# Altium PCB MCU_PCB_Design_2.PcbDoc
Units mm, origin at the board's own origin, x right, y up, seen from the top; angles counter-clockwise.
Board outline 81.89 x 57.07 mm, 4 copper layers (Top Layer, Middle Layer, Blank Copper Layer, Bottom Layer), stack 0.567 mm thick; 30 components, 61 nets, 178 pads, 54 vias.
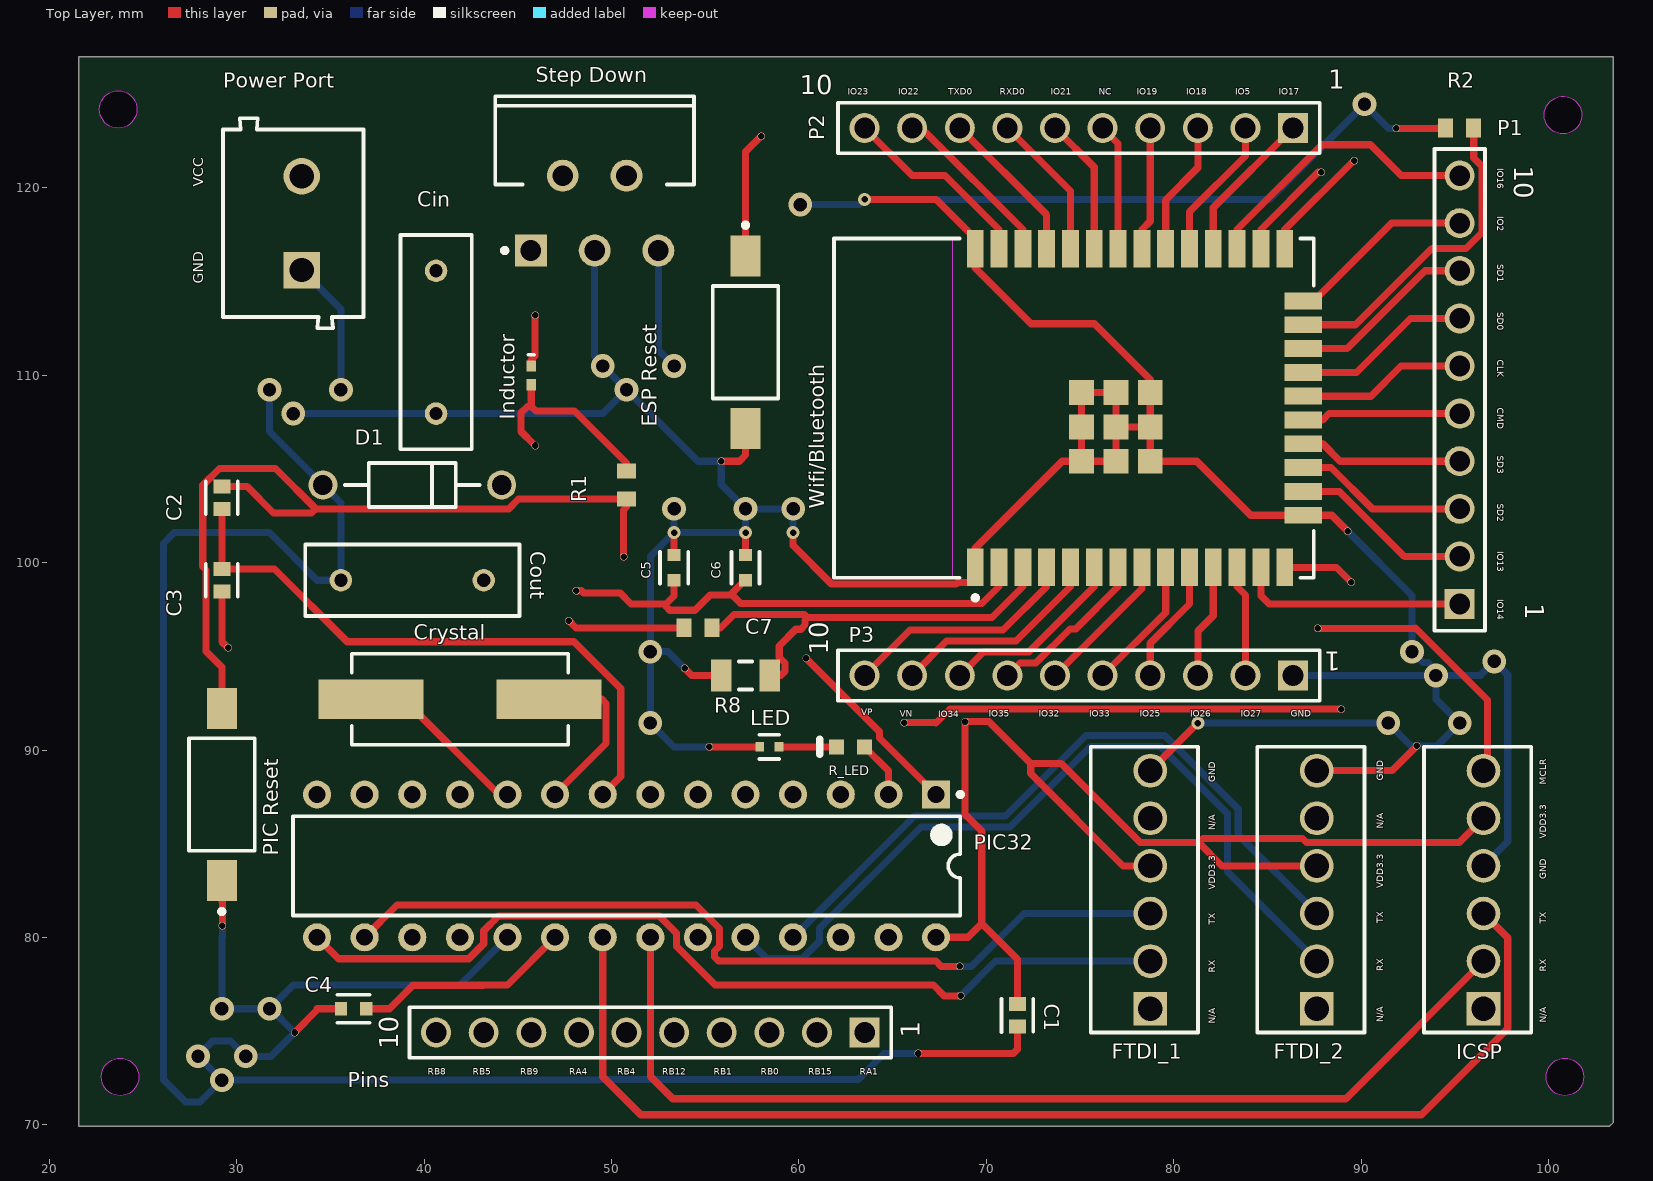
[diagram p0: Top Layer view]
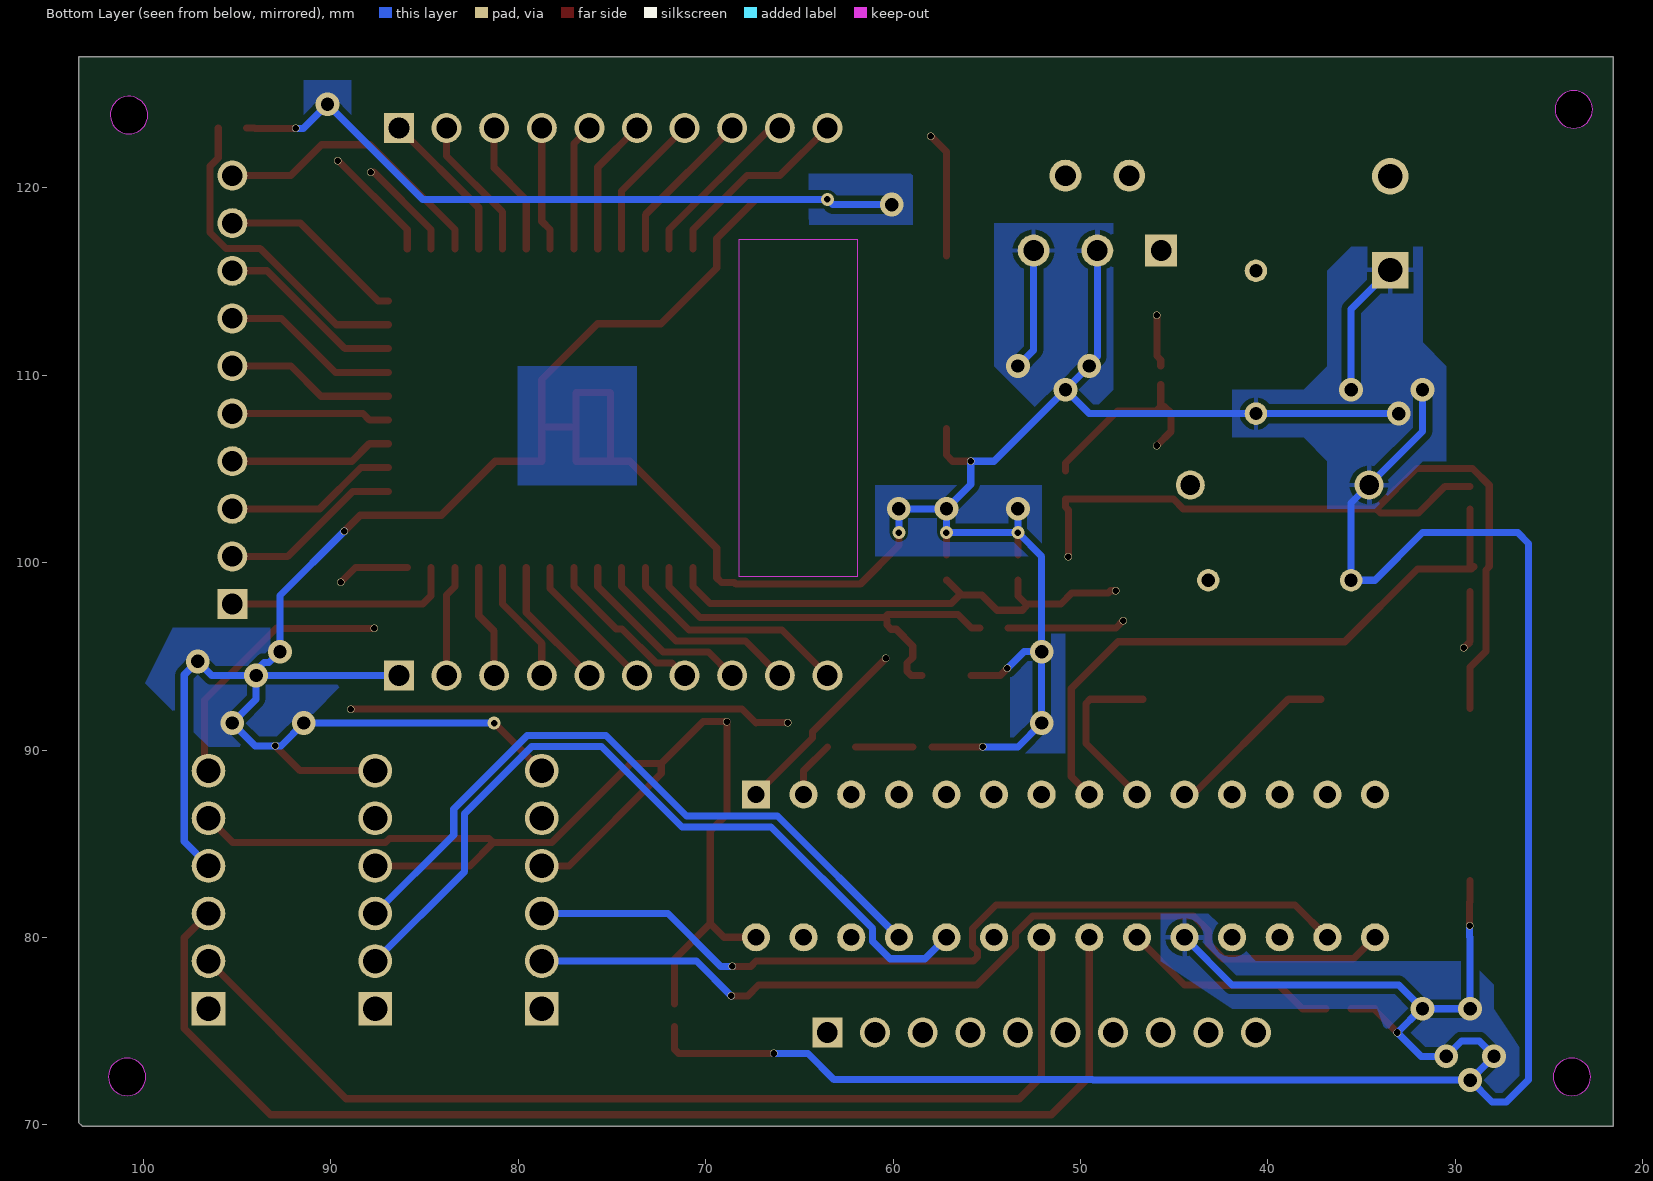
[diagram p1: Bottom Layer view, seen from below]
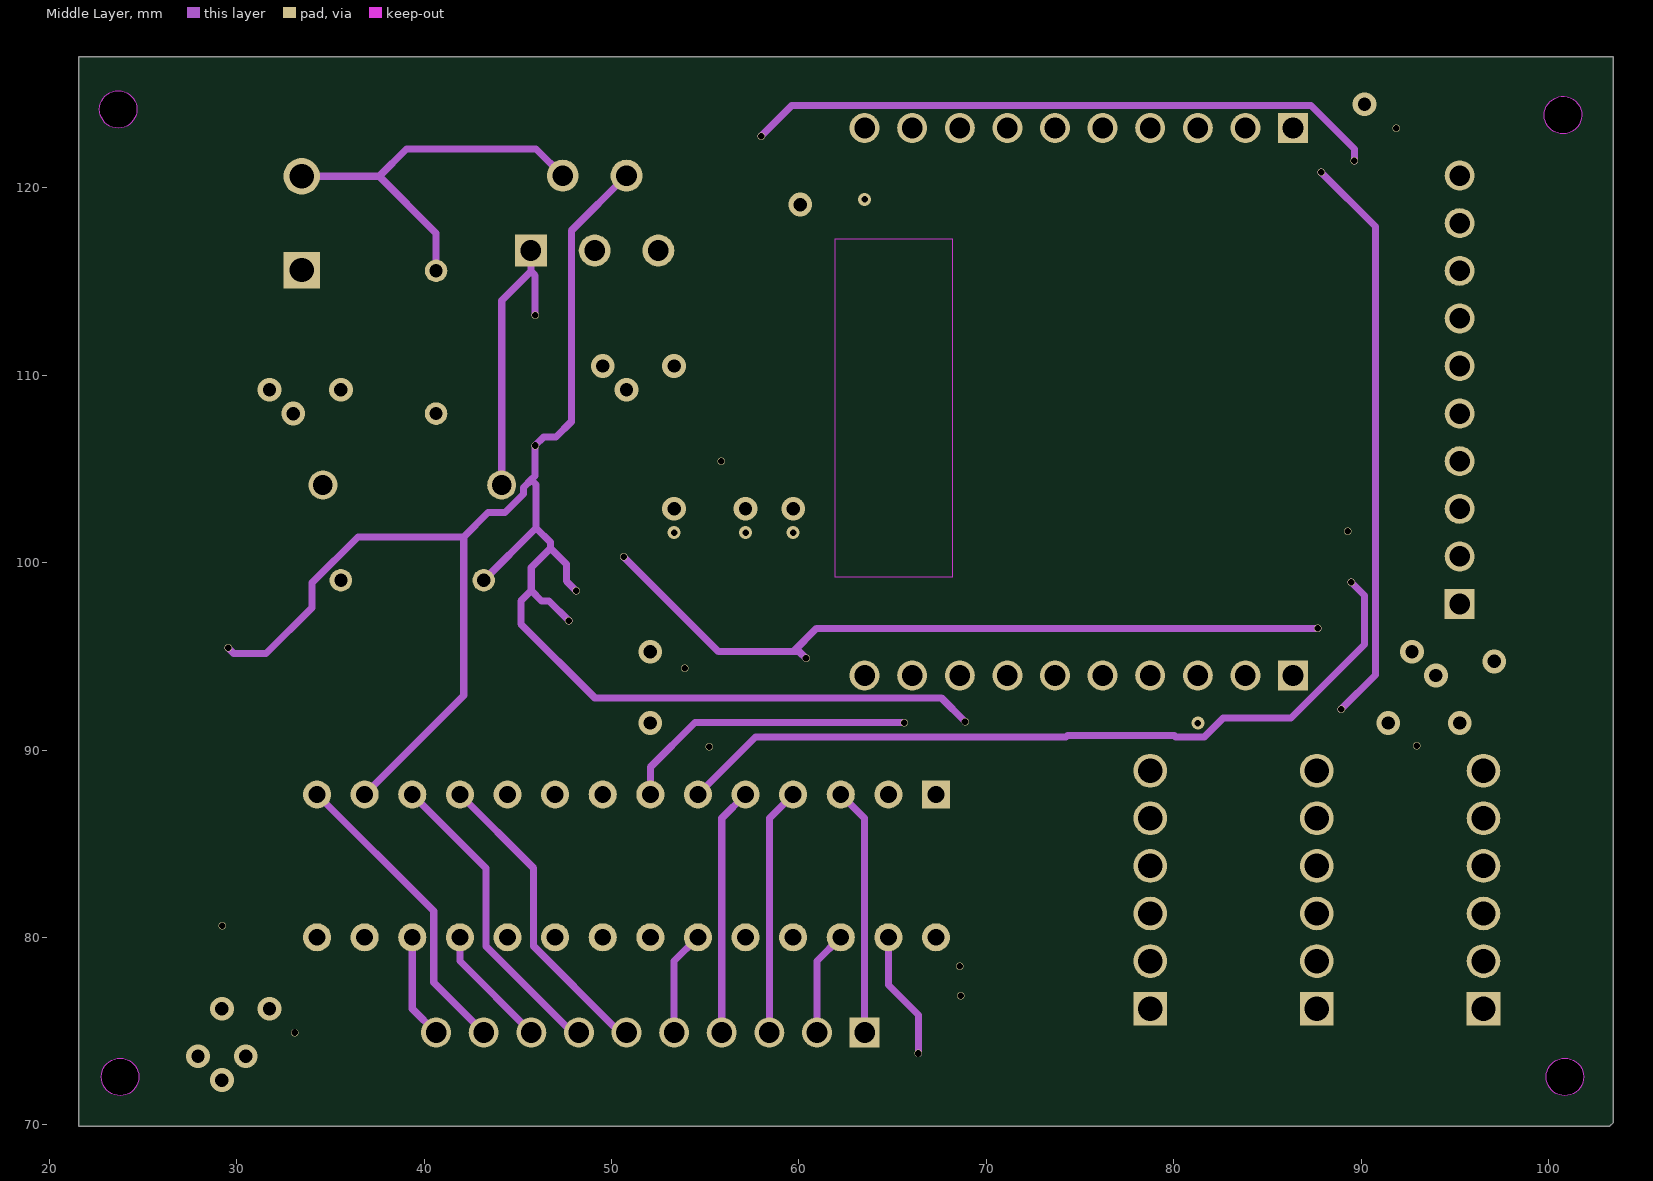
[diagram p2: Middle Layer]
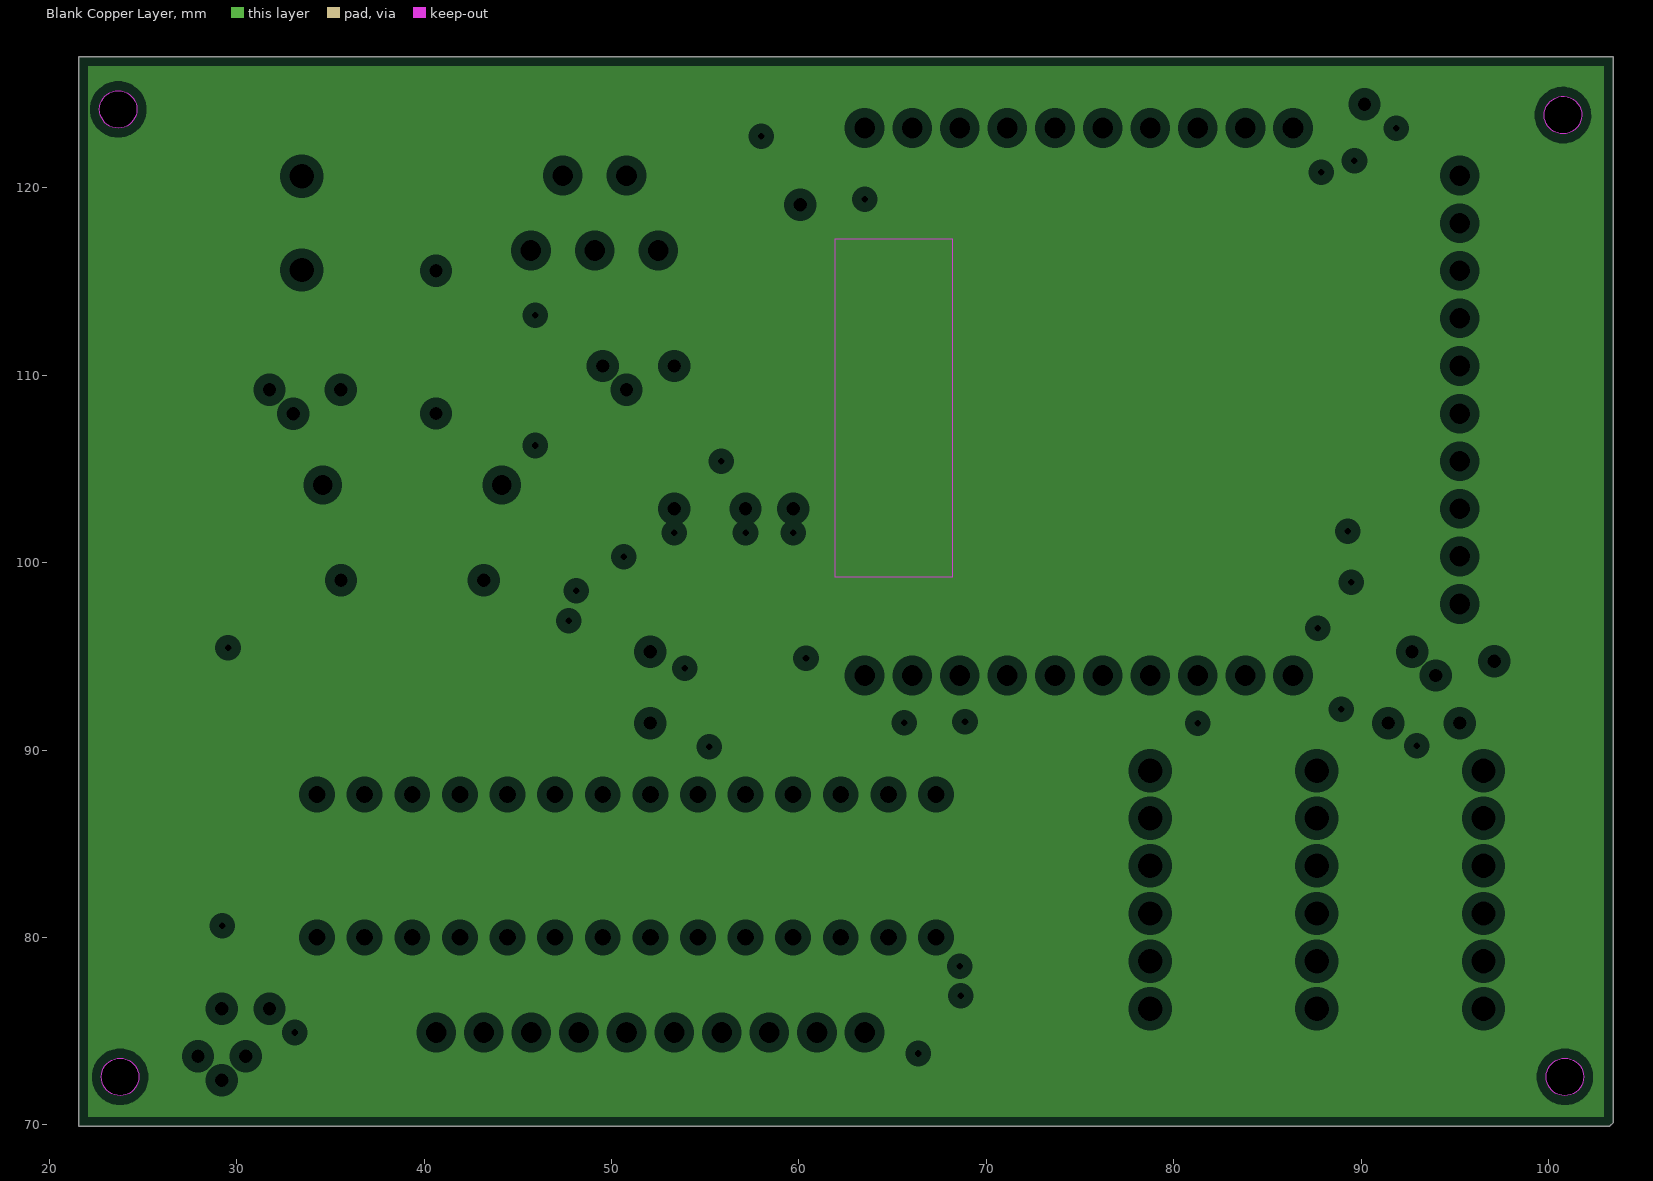
[diagram p3: Blank Copper Layer, clearances drawn from the general rule]
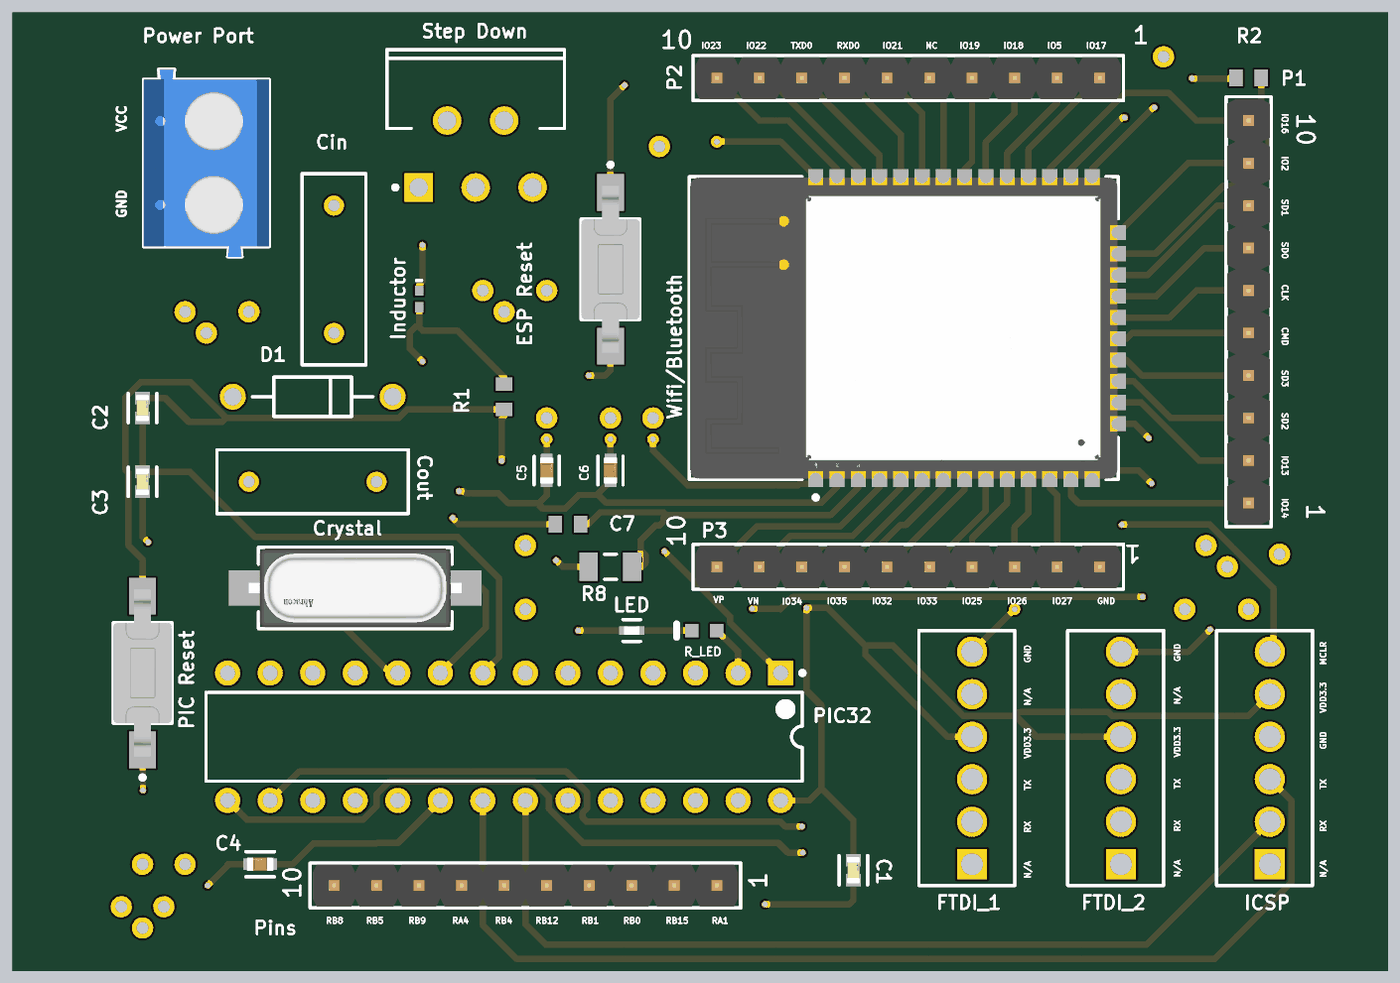
[diagram p4: 3D render of the assembled board from above, using the file's embedded part models]

## Layer stack, top to bottom
Top Solder: solder mask 0.0102, Solder Resist, Dk 3.5
Top Layer: signal copper 0.035
Dielectric 1: prepreg 0.32, FR-4, Dk 4.8
Middle Layer: signal copper 0.0175
Dielectric 3: prepreg 0.0711, PP-006, Dk 4.1
Blank Copper Layer: plane copper 0.0175
Dielectric 2: prepreg 0.0711, PP-006, Dk 4.1
Bottom Layer: signal copper 0.035
Bottom Solder: solder mask 0.0102, Solder Resist, Dk 3.5

## Board outline
21.565,69.926 21.565,126.975 21.59,127 103.454,127 103.454,70.129 103.251,69.926
cut-out: 23.682,123.182 cw(c23.682,124.182) 22.682,124.182 cw(c23.682,124.182) 23.682,125.182 cw(c23.682,124.182) 24.682,124.182 cw(c23.682,124.182)
cut-out: 100.762,122.876 cw(c100.762,123.876) 99.762,123.876 cw(c100.762,123.876) 101.144,124.8 cw(c100.762,123.876)
cut-out: 23.784,71.565 cw(c23.784,72.565) 22.784,72.565 cw(c23.784,72.565) 23.784,73.565 cw(c23.784,72.565) 24.784,72.565 cw(c23.784,72.565)
cut-out: 100.863,71.565 cw(c100.863,72.565) 99.863,72.565 cw(c100.863,72.565) 100.863,73.565 cw(c100.863,72.565) 101.863,72.565 cw(c100.863,72.565)

## Design rules (kind name [scope] priority, off if disabled: settings)
AcuteAngle [All] p1: minimum=4.50000000000000E+0001 checktracksonly=TRUE
AssemblyTestPointUsage [(not InNetClass('NOTESTPOINTS'))] p1: allowmultiple=TRUE
AssemblyTestPointUsage AssemblyTestPointUsageN [InNetClass('NOTESTPOINTS')] p2: valid=2 allowmultiple=TRUE
AssemblyTestpoint [All] p1: testpointundercomponent=TRUE minsize=0.8 maxsize=2 preferedsize=1 minholesize=0 maxholesize=0.35 preferedholesize=0 testpointgrid=1.27 usegrid=FALSE gridoriginx=87.5 gridoriginy=62.5 gridtolerance=0 allowsidetop=TRUE minspacing=2.54 // Zollner
BoardOutlineClearance BoardCopperOutlineClearance [(OnLayer('Top Layer') OR OnLayer('Bottom Layer') )] p1: gap=0.2 ignorepadtopadclearanceinfootprint=FALSE
Clearance PadToViaClearance [IsVia and not IsComponentVia vs IsPad] p1: gap=0.02 ignorepadtopadclearanceinfootprint=TRUE
Clearance "Clearance (FAB)" [All] p2: gap=0.203 ignorepadtopadclearanceinfootprint=TRUE except(0.305: Arc-Poly Track-Poly SMDPad-Poly THPad-Poly Via-Poly Fill-Poly Poly-Poly)
ComponentClearance ComponentClearance_NetTie [((ObjectKind = 'Component') And (ComponentType = 'Net Tie')) Or (Footprint = 'StarPoint') Or (Footprint like 'NetTieVia*')] p1: gap=-3.81 collisioncheckmode=3 verticalgap=-3.81 showdistances=FALSE
ComponentClearance [All] p2: gap=0.254 collisioncheckmode=3 verticalgap=0.254 showdistances=FALSE
DiffPairsRouting [All] p1: maxlimit=1.27 minlimit=0.09 mostfreqgap=0.203 toplayer_minwidth=0.09 toplayer_maxwidth=2.54 toplayer_prefwidth=0.254 midlayer1_mingap=0.127 midlayer1_minwidth=0.127 midlayer1_maxwidth=2.54 midlayer1_prefwidth=0.254 bottomlayer_minwidth=0.09 bottomlayer_maxwidth=2.54 bottomlayer_prefwidth=0.254 maxuncoupledlength=12.7
FabricationTestPointUsage [All] p1: valid=2 allowmultiple=FALSE
FabricationTestpoint [All] p1: side=3 testpointundercomponent=TRUE minsize=1.016 maxsize=2.54 preferedsize=1.524 minholesize=0 maxholesize=1.016 preferedholesize=0.813 testpointgrid=0.025 allowsidetop=TRUE allowsidebottom=TRUE usegrid=FALSE gridtolerance=0
HoleSize [All] p1: absolutevalues=TRUE maxlimit=6.3 minlimit=0.2 maxpercent=80.000 minpercent=20.000 // Zollner
HoleToHoleClearance HoleToHoleClearance_NetTieVia [InPadClass('NetTieVias') vs InPadClass('NetTieVias')] p1: gap=0.5 allowstackedmicrovias=TRUE
HoleToHoleClearance [All] p2: gap=0.254 allowstackedmicrovias=TRUE // Zollner
MinimumAnnularRing [All] p1: minimumring=0.15 // PCBWAY
MinimumSolderMaskSliver [All] p1: minsoldermaskwidth=0.2 // Zollner
PlaneClearance PlaneClearance_1 [All] p1: clearance=0.508
PlaneConnect [All] p1: pad.planeconnectstyle=Relief pad.reliefexpansion=0.508 pad.reliefentries=4 pad.reliefconductorwidth=0.254 pad.reliefairgap=0.254 via.planeconnectstyle=Direct via.reliefexpansion=0.508 via.reliefentries=4 via.reliefconductorwidth=0.254 via.reliefairgap=0.254
PolygonConnect [All] p1: thpad.connectstyle=Relief thpad.reliefconductorwidth=0.254 thpad.reliefentries=4 thpad.polygonreliefangle="90 Angle" thpad.airgapwidth=0.254 smdpad.connectstyle=Relief smdpad.reliefconductorwidth=0.254 smdpad.reliefentries=4 smdpad.polygonreliefangle="90 Angle" smdpad.airgapwidth=0.254 via.connectstyle=Direct via.reliefconductorwidth=0.254 via.reliefentries=4 via.polygonreliefangle="90 Angle" via.airgapwidth=0.254
RoutingVias [All] p1: holewidth=0.35 width=0.4 viastyle="Through Hole" minholewidth=0.2 minwidth=0.2 maxholewidth=6.35 maxwidth=1.27
SMDEntry [not IsTestpoint] p1: side=TRUE corner=TRUE anyangle=FALSE
SMDNeckDown [not IsTestpoint] p1: percent=90.000
SMDToCorner [All] p1: distance=10000
SMDToPlane [All] p1: distance=0
ShortCircuit [All vs not IsBoardCutoutRegion] p1: allowed=FALSE
SilkToSolderMaskClearance [IsPad] p1: minsilkscreentomaskgap=0.127 clearancetoexposedcopper=TRUE
SolderMaskExpansion [All] p1: expansion=0.127 istentingtop=FALSE // Zollner
SolderMaskExpansion SolderMaskExpansionToHoles [All] p2: expansion=0.1 istentingtop=FALSE soldermaskfromhole=TRUE // Zollner
UnRoutedNet [All] p1: checkbadconnections=TRUE
Width [All] p1: maxlimit=0.5 minlimit=0.203 preferedwidth=0.254
16 further rules are at their usual default settings.

## Classes and differential pairs
component class voltage_regulator: Cin Cout D1 Inductor "Power Port" "Step Down"
component class pic32: C1 C2 C3 C4 Crystal FTDI_1 FTDI_2 ICSP LED PIC32 "PIC Reset" Pins R1 R_LED
component class esp32_wroom: C5 C6 C7 "ESP Reset" P1 P2 P3 R2 R8 Wifi/Bluetooth

## Components (designator, comment, footprint, x,y, rotation, side; value= is the part's Value field where it differs from the comment)
C1 "0.1µF" FP-C0603C-CF-MFG 71.653,75.844 r270 top value="0.10 μF"
C2 "0.1µF" FP-C0603C-CF-MFG 29.21,103.47 r270 top value="0.10 μF"
C3 "0.1µF" FP-C0603C-CF-MFG 29.21,99.06 r270 top value="0.10 μF"
C4 "10µF" FP-GRM188-0_1-e0_2_0_55-MFG 36.235,76.2 r180 top
C5 "10µF" FP-GRM188-0_1-e0_2_0_55-MFG 53.34,99.735 r90 top
C6 "10µF" FP-GRM188-0_1-e0_2_0_55-MFG 57.15,99.735 r90 top
C7 "1μF" CAPC3216X110X50LL20T25 57.15,93.98 r0 top
Cin "Cap" RAD-0.3 40.64,111.76 r90 top value=4.7uF
Cout "Cap" RAD-0.3 39.37,99.06 r180 top value=4.7uF
Crystal "" FP-ABLS-MFG 41.91,92.71 r180 top
D1 "1N5817" ONSC-AXIAL_LEAD-2-59-10_P 39.37,104.14 r180 top
"ESP Reset" "FSMSM" TECO-FSMSM-2_V 57.15,111.76 r270 top (schematic designator Switch2)
FTDI_1 "640456-6" TECO-640456-6_V 78.74,76.2 r90 top
FTDI_2 "640456-6" TECO-640456-6_V 87.63,76.2 r90 top
ICSP "640456-6" TECO-640456-6_V 96.52,76.2 r90 top
Inductor "68uH" 0402-A 45.72,109.99 r270 top
LED "HSMG-C190" AVAG-HSMX-C190_V 62.75,90.17 r180 top
P1 "61301011121" 61301011121 95.25,109.22 r90 top locked
P2 "61301011121" 61301011121 74.93,123.19 r180 top locked
P3 "61301011121" 61301011121 74.93,93.98 r180 top locked
PIC32 "PIC32MX150F128B-I/SP" MCHP-SPDIP-SP28 50.8,83.82 r270 top
"PIC Reset" "FSMSM" TECO-FSMSM-2_V 29.21,87.63 r90 top (schematic designator Switch)
Pins "61301011121" 61301011121 52.07,74.93 r180 top
"Power Port" "12V" 691102710002 33.02,118.11 r90 top locked
R1 "10k" RESC1608X55X25ML10T15 50.8,104.14 r90 top
R2 "10k" RESC1608X55X25ML10T15 95.25,123.19 r0 top
R8 "10k" RESC1608X55X25ML10T15 54.61,96.52 r180 top
R_LED "470" FP-CR0402-MFG 58.42,90.17 r0 top
"Step Down" "LM2595T-3.3/NOPB" NDH0005A 49.1,118.65 r0 top locked
Wifi/Bluetooth "ESP32-WROOM-32" FP-ESP32-WROOM-32-MFG 74.665,108.245 r90 top locked

## Footprints (in the part's own frame and the unit in brackets; to place one, negate y for a bottom-side part, rotate by r counter-clockwise, add the part's x,y. Pads: shape width x height; smd on the part's side, far side on the other; paste and mask are expansions set on the pad)
0402-A [mm] "Chip Inductor, Body 1.0x0.5mm, IPC High Density"
  rect 0.6x0.5 smd: 1(-0.5,0) 2(0.5,0)
  silkscreen extent -1.1,-0.15 -1.1,0.15, body extent -0.55,-0.3 0.55,0.3, height 0.55
61301011121 [mm] "Pin Header, pitch 2.54 mm, THT, Vertical, single row, 10p"
  rect 1.6x1.6 hole 1.1: 1(-11.43,0)
  round 1.6 hole 1.1: 2(-8.89,0) 3(-6.35,0) 4(-3.81,0) 5(-1.27,0) 6(1.27,0) 7(3.81,0) 8(6.35,0) 9(8.89,0) 10(11.43,0)
  silkscreen extent -12.85,-1.35 12.85,1.35, body extent -12.7,-1.27 12.7,1.27, height 8.57
691102710002 [mm] "5,00mm - modular - blue - Horizontal entry with pressure clamp - 9,9 mm height - 02p"
  rect 1.95x1.95 hole 1.3: 1(-2.5,-0.45)
  round 1.95 hole 1.3: 2(2.5,-0.45)
  silkscreen extent -5.6,-3.75 5.6,3.75, body extent -5.6,-3.75 5.6,3.75, height 9.96
AVAG-HSMX-C190_V [mm] "SMD, 2-Leads, Body 1.6x0.8mm, Height 0.9mm"
  rect 0.8x0.8 smd: 1(-0.75,0) 2(0.75,0)
  silkscreen extent 1.65,-0.4 1.65,0.4, body extent -0.8,-0.4 0.8,0.4, height 0.9
CAPC3216X110X50LL20T25 [mm] "Chip Capacitor, 2-Leads, Body 3.20x1.60mm, IPC High Density"
  rect 1.1x1.7 smd: 1(-1.3,0) 2(1.3,0)
  silkscreen extent -0.35,-0.75 0.35,0.75, body extent -1.7,-0.9 1.7,0.9, height 1.1
FP-ABLS-MFG [mm]
  rect 5.6x2.1 smd paste+0 mask+0: 1(-4.75,0) 2(4.75,0)
  silkscreen extent -5.77,-2.42 5.77,2.42, body extent -7.65,-2.52 7.65,2.52, height 0.25
FP-C0603C-CF-MFG [mm]
  rect 0.75x0.9 smd paste+0 mask+0: 1(-0.6,0) 2(0.6,0)
  silkscreen extent -0.87,-0.85 0.88,0.85, body extent -1.2,-0.6 1.2,0.6, height 0.25
FP-CR0402-MFG [mm]
  rect 0.475x0.5 smd paste+0 mask+0: 1(-0.512,0) 2(0.513,0)
  silkscreen extent -0.53,-0.65 0.53,0.65, body extent -0.85,-0.38 0.85,0.38, height 0.25
FP-ESP32-WROOM-32-MFG [mm]
  rect 2x0.9 smd paste+0 mask+0: 1(-8.5,5.26) 2(-8.5,3.99) 3(-8.5,2.72) 4(-8.5,1.45) 5(-8.5,0.18) 6(-8.5,-1.09) 7(-8.5,-2.36) 8(-8.5,-3.63) 9(-8.5,-4.9) 10(-8.5,-6.17) 11(-8.5,-7.44) 12(-8.5,-8.71) 13(-8.5,-9.98) 14(-8.5,-11.25) 25(8.5,-11.25) 26(8.5,-9.98) 27(8.5,-8.71) 28(8.5,-7.44) 29(8.5,-6.17) 30(8.5,-4.9) 31(8.5,-3.63) 32(8.5,-2.36) 33(8.5,-1.09) 34(8.5,0.18) 35(8.5,1.45) 36(8.5,2.72) 37(8.5,3.99) 38(8.5,5.26)
  rect 0.9x2 smd paste+0 mask+0: 15(-5.715,-12.25) 16(-4.445,-12.25) 17(-3.175,-12.25) 18(-1.905,-12.25) 19(-0.635,-12.25) 20(0.635,-12.25) 21(1.905,-12.25) 22(3.175,-12.25) 23(4.445,-12.25) 24(5.715,-12.25)
  rect 1.33x1.33 smd paste+0 mask+0: 39(-2.835,-2.24) 39(-2.835,-0.405) 39(-2.835,-4.075) 39(-1,-0.405) 39(-1,-4.075) 39(-1,-2.24) 39(0.835,-0.405) 39(0.835,-4.075) 39(0.835,-2.24)
  Keep-Out Layer region: -9,6.45 9,6.45 9,12.75 -9,12.75
  Keep-Out Layer region: -9,6.45 9,6.45 9,12.75 -9,12.75
  silkscreen extent -10.25,-12.8 9.05,12.8, body extent -9.6,-13.35 9.6,12.9, height 0.25
FP-GRM188-0_1-e0_2_0_55-MFG [mm]
  rect 0.65x0.7 smd paste+0 mask+0: 1(-0.675,0) 2(0.675,0)
  silkscreen extent -0.85,-0.75 0.85,0.75, body extent -1.1,-0.55 1.1,0.55, height 0.25
MCHP-SPDIP-SP28 [mm] "DIP, 28-Leads, Body 34.86x6.79mm, Pitch 2.54mm"
  rect 1.5x1.5 hole 0.9: 1(-3.81,16.51)
  round 1.5 hole 0.9: 2(-3.81,13.97) 3(-3.81,11.43) 4(-3.81,8.89) 5(-3.81,6.35) 6(-3.81,3.81) 7(-3.81,1.27) 8(-3.81,-1.27) 9(-3.81,-3.81) 10(-3.81,-6.35) 11(-3.81,-8.89) 12(-3.81,-11.43) 13(-3.81,-13.97) 14(-3.81,-16.51) 15(3.81,-16.51) 16(3.81,-13.97) 17(3.81,-11.43) 18(3.81,-8.89) 19(3.81,-6.35) 20(3.81,-3.81) 21(3.81,-1.27) 22(3.81,1.27) 23(3.81,3.81) 24(3.81,6.35) 25(3.81,8.89) 26(3.81,11.43) 27(3.81,13.97) 28(3.81,16.51)
  silkscreen extent -3.93,-17.8 2.65,17.94, body extent -3.95,-17.77 3.95,17.77, height 5.08
NDH0005A [mm] "FM, 5-Leads, Body 10.6x4.7mm, Pitch 1.7mm"
  rect 1.7x1.7 hole 1.1: 1(-3.4,-2)
  round 1.7 hole 1.1: 2(-1.7,2) 3(0,-2) 4(1.7,2) 5(3.4,-2)
  silkscreen extent -5.3,-2.12 5.3,6.23, body extent -5.35,-2.31 5.35,6.28, height 21.1
ONSC-AXIAL_LEAD-2-59-10_P [mm] "AXIAL, 2-Leads, Diameter 2.35mm"
  round 1.55 hole 1.05: 1(-4.77,0) 2(4.77,0)
  silkscreen extent -3.59,-1.17 3.59,1.17
RAD-0.3 [mm] "Radial Cap, Thru-Hole; 2 Leads; 0.3 in Pin Spacing"
  round 1.2 hole 0.7: 1(-3.81,0) 2(3.81,0)
  silkscreen extent -5.71,-1.91 5.71,1.91
RESC1608X55X25ML10T15 [mm] "Chip Resistor, 2-Leads, Body 1.60x0.80mm, IPC Low Density"
  rect 0.8x1 smd: 1(-0.75,0) 2(0.75,0)
  body extent -0.85,-0.45 0.85,0.45, height 0.55
TECO-640456-6_V [mm] "THD, 6-Leads, Body 15.24x5.72mm, Pitch 2.54mm"
  rect 1.8x1.8 hole 1.3: 1(0,0)
  round 1.8 hole 1.3: 2(2.54,0) 3(5.08,0) 4(7.62,0) 5(10.16,0) 6(12.7,0)
  silkscreen extent -1.27,-2.54 13.97,3.18, body extent -1.27,-2.54 13.97,3.18, height 10.03
TECO-FSMSM-2_V [mm] "SMD, 2-Leads, Body 6x3.5mm, Pitch 9.19mm"
  rect 2.2x1.6 smd: 1(-4.595,0)
  rect 2.18x1.6 smd: 2(4.595,0)
  silkscreen extent -6.37,-1.75 3,1.75, body extent -4.98,-1.75 4.98,1.75, height 4.4

## Part data
C1 C2 C3: library part CMP-2006-03061-2, "CAP CER 0.1UF 50V X7R 0603 / C0603C104K5RACTU", Capacitance="0.10 μF", Manufacturer=KEMET, Manufacturer Part Number=C0603C104K5RACTU, Package=C0603C-CF, Temperature="-55°C to +125°C", Temperature Characteristic=X7R, Temperature Coefficient=30ppm/°C, Temperature Range High=+125°C, Temperature Range Low=-55°C, Tolerance=0.1, Voltage Rating="50 V", Automotive=Yes, Automotive Grade="Grade 1", Category=Cap, ComponentLink2Description=Datasheet, ComponentLink2URL=https://api.kemet.com/component-edge/download/datasheet/C0603C100J5GACAUTO.pdf, Device Class L1="Passive Components", Device Class L2=Capacitors, Device Class L3="Ceramic Capacitors", Digikey Description="CAP CER 0.1UF 50V X7R 0603", Height=0.87mm, Lead Free=Yes, Material=Ceramic, Octopart=https://octopart.com/c0603c104k5ractu-kemet-139244, RoHS=TRUE
C4 C5 C6: library part CMP-2006-02793-3, "Chip Multilayer Ceramic Capacitors for General Purpose, 0603, 10uF, X5R, 15%, 20%, 6.3V / GRM188R60J106ME47J", Capacitance=10uF, Case Code (Imperial)=0603, Case Code (Metric)=1608, Dielectric=X5R, Max Operating Temperature=85°C, Min Operating Temperature=-55°C, Package Quantity=10000, Tolerance=20%, Voltage=6.3V, Case/Package=0603, Depth=0.8mm, Height=0.8mm, Lead Free="Lead Free", Length=1.6mm, Mount="Surface Mount", Packaging="Tape and Reel", Radiation Hardening=No, REACH SVHC="No SVHC", Termination=SMD/SMT, Thickness=0.035inch, Voltage Rating=6.3V, Voltage Rating (DC)=6.3V, Width=0.8mm
C7: library part CMP-2000-06011-1, "Chip Capacitor, 1 uF, +/- 10%, 50 V, -55 to 125 degC, 1206 (3216 Metric), RoHS, Tape and Reel / C1206C105K5RACTU", Capacitance=1uF, Capacitance - nF=1000nF, Case Code - in=1206, Case Code - mm=3216, Case Height=1mm, Case Length=3.2mm, Case Width=1.6mm, Dielectric=X7R, Manufacturer=Kemet, Maximum Operating Temperature=+125C, Minimum Operating Temperature=-55C, Operating Temperature Range=-55Cto+125C, Package / Case=1206(3216metric), Package Description="2-Pin Surface Mount Device, Body 3.2 x 1.6 mm", Temperature Coefficient / Code=+/-15%, Tolerance=10%, Voltage Rating=50V, Brand=Kemet, Class=Class1, Datasheet URL=http://www.kemet.com/docfinder?Partnumber=C1206C105K5RACTU, Datasheet Version=02/2016, Dimensions=1.6mmWx3.2mmLx1mmH, Factory Pack Quantity=2500, Manufacturer URL=http://www.kemet.com/, Mounting Technology=SurfaceMount, Package Reference=1206, Packaging=Reel, Product=GeneralTypeMLCCs, Product Category=MultilayerCeramicCapacitorsMLCC-SMD/SMT, RoHS=Details, Series=C1206C, Termination Style=SMD/SMT, Type=SMDMLCCX7R6.3-250VDCCommericalGrade, Voltage Rating DC=50V
Cin: "Capacitor", Supplier Part Number 1=399-T356E475M035AT-ND, LatestRevisionDate=17-Jul-2002, LatestRevisionNote="Re-released for DXP Platform.", PackageDescription="Radial Cap, Thru-Hole; 2 Leads; 0.3 in Pin Spacing", PackageReference=RAD-0.3, Published=8-Jun-2000, Publisher="Altium Limited", Supplier 1=Digi-Key
Cout: "Capacitor", LatestRevisionDate=17-Jul-2002, LatestRevisionNote="Re-released for DXP Platform.", PackageDescription="Radial Cap, Thru-Hole; 2 Leads; 0.3 in Pin Spacing", PackageReference=RAD-0.3, Published=8-Jun-2000, Publisher="Altium Limited"
Crystal: library part CMP-27762-000003-1, "CRYSTAL 16.0000MHZ 18PF SMD / ABLS-16.000MHZ-K4T", Frequency=16MHz, Load Capacitance=18pF, Manufacturer=Abracon, Manufacturer Part Number=ABLS-16.000MHZ-K4T, Package=ABLS, Temperature="-40°C to +125°C", Temperature Range High=+125°C, Temperature Range Low=-40°C, Tolerance=30ppm, Automotive=No, Category=Crys, ComponentLink2Description=Datasheet, ComponentLink2URL=https://abracon.com/Resonators/abls.pdf, Device Class L1="Passive Components", Device Class L2="Crystals / Oscillators", Device Class L3=Crystals, Digikey Description="CRYSTAL 16.0000MHZ 18PF SMD", Esr=40Ω, Height=4.3mm, Lead Free=Yes, Mouser Description="Crystal 16MHz ±30ppm (Tol) ±50ppm (Stability) 18pF FUND 40Ohm 2-Pin HC-49/US SMD T/R", Octopart=https://octopart.com/abls-16.000mhz-k4t-abracon-18618626, RoHS=TRUE, Series=ABLS, Stability=50ppm, Standoff Height=0mm
D1: library part CMP-1055-00036-1, "Rectifier, 2-Pin Axial_Lead, Pb-Free, Bulk Bag", Manufacturer="On Semiconductor", ComponentLink1Description="Manufacturer URL", ComponentLink1URL=http://www.onsemi.com/, ComponentLink2Description=Datasheet, ComponentLink2URL=http://www.onsemi.cn/pub_link/Collateral/1N5817-D.PDF, ComponentLink3Description="Package Specification", ComponentLink3URL=http://www.onsemi.cn/pub_link/Collateral/59-10.PDF, Configuration=Single, DatasheetVersion="Rev. 10", IFSM Max (A)=25, Mounting Technology="Through Hole", Note1=0, PackageDescription="2-Pin, Axial Lead, Diameter 2.35 mm", PackageReference=AXIAL_LEAD-2-59-10, PackageVersion="Rev. U, 02/2005", Packing="Bulk Bag", PartNumber=1N5817, RoHS=TRUE
"ESP Reset" "PIC Reset": library part CMP-2000-07511-1, "FSMSM Push Button Switch, 50 mA, -35 to 85 degC, 2-Pin SMD, RoHS, Bulk", Case\/Package=SMD/SMT, Contact Current Rating=50mA, Contact Resistance=100mOhm, Manufacturer="TE Connectivity", Max Operating Temperature=85degC, Max Voltage Rating (DC)=12V, Min Operating Temperature=-35degC, Operating Force=180gf, Package Description="2-Pin Surface Mount Device, Body 6 x 3.5 mm, Pitch 9.19 mm", Package Quantity=1000, Voltage Rating (DC)=24V, Actuator Length=1.07mm, Actuator Material=Polyamide, Contact Material=Brass, Contact Plating=Silver, Current Rating=50mA, Datasheet URL=http://www.te.com/commerce/DocumentDelivery/DDEController?Action=showdoc&DocId=Customer+Drawing%7F1437566-3%7FC2%7Fpdf%7FEnglish%7FENG_CD_1437566-3_C2_1437566_3_1_c.dwg.pdf%7F1437566-3, Datasheet Version="Rev. C2, 08/2014", Electrical Life=20000Cycles, ELV=Compliant, Illumination Type=Illuminated, Lead Free=LeadFree, Manufacturer URL=http://www.te.com/, Mechanical Life=20000Cycles, Mount=SurfaceMount, Mounting Technology=SurfaceMount, Orientation=Straight, Package Reference=FSMSM, Packaging=LoosePiece, REACH SVHC=Unknown, RoHSCompliant=true, Switch Travel=0.25mm, Termination=GullWing, Throw Configuration=SPST
FTDI_1 FTDI_2 ICSP: library part CMP-2000-05661-1, "Male Header, Pitch 2.54 mm, 1 x 6 Position, Height 10.03 mm, Tail Length 3.56 mm, -55 to 105 degC, Bulk", Color=White, Current, Rating="5 /  / A", Flammability Rating=UL94V-0, Manufacturer="TE Connectivity", Package Description="Male Header, Pitch 2.54 mm, 1 x 6 Position, Height 10.03 mm, Tail Length 3.56 mm", Temperature, Operating="-55to+105 /  / °C", Voltage, Rating="250 /  / V", Agency Approvals=CSA,UL, Angle=Straight, Brand/Series=MTA-100Series, Color, Housing=White, Connector Type=MTA-100, Contact Centerline Spacing="0.100 /  / in.", Contact Mating Area Plating=Tin, Contact Plating=Tin, Contact Shape=Square, Contact Termination Area Plating=Tin, Datasheet URL=https://datasheet.ciiva.com/25618/0900766b80eb7fdd-25618163.pdf, Datasheet Version="Rev. W, 05/2005", Length, Overall="0.6 /  / \"", Length, Pin="0.14 /  / \"", Length, Terminal Post="0.14 /  / in.", Manufacturer URL=http://www.te.com/, Material, Contact=CopperAlloy, Material, Housing=Polyester, Mount Angle=Vertical, Mounting Hole Size="0.04 /  / \"", Mounting Technology=ThroughHole, Mounting Type=PCMount, Number of Contacts=6, Number of Positions=6, Number of Rows=1, Package Reference=640456-6, Pin Spacing="0.1 /  / \"", Primary Type=InterconnectSystem, Size, Post="0.025 /  / in.", Special Features=Pinstrip, Standards=RoHSCompliant,ELVCompliant,UL94V-0, Termination=Solder, Type=PCBPlug
Inductor: library part Inductor, "Inductor", Supplier Part Number 1=495-76029-1-ND, Code_IEC=1005, Code_JEITA=0402, LatestRevisionDate=29-May-2009, LatestRevisionNote="IPC-7351 Footprint Added.", PackageDescription="Chip Inductor", PackageReference=0402-A, Published=8-Jun-2000, Publisher="Altium Limited", Supplier 1=Digi-Key
LED: library part CMP-1744-00002-1, "Chip LED, Green, 2.2 V, -40 to 85 degC, 2-Pin SMD, RoHS, Tape and Reel / HSMG-C190", Case\Package=SOIC, Clock Frequency="100 KHz", Frequency="400 KHz", Max Operating Temperature="85 degC", Max Supply Voltage="5.5 V", Min Operating Temperature="-40 degC", Min Supply Voltage="1.7 V", Nominal Supply Current="2 mA", Package Quantity=3000, Access Time="3500 ns", ComponentLink1Description="Manufacturer URL", ComponentLink1URL=http://www.avagotech.com/, ComponentLink2Description=Datasheet, ComponentLink2URL=http://docs.avagotech.com/docs/AV02-0551EN, ComponentLink3Description="Package Specification", ComponentLink3URL=http://www.fairchildsemi.com/dwg/MA/MA03D.pdf, DatasheetVersion=Mar-12, Density="32 kb", Height="1.5 mm", Interface=Serial, Length="5 mm", Max Clock Frequency="100 KHz", Mount="Surface Mount", PackageDescription="2-Pin Surface Mount Device, Body 1.6 x 0.8 mm, Height 0.9 mm", PackageReference=HSMX-C190, Packaging="Tape and Reel", Pins=8, Radiation Hardening=No, REACH SVHC="No SVHC", RoHSCompliant=true, Width="4 mm"
P1 P2 P3 Pins: library part CMP-1502-01082-1, "THT Vertical Pin Header WR-PHD, Pitch 2.54 mm, Single Row, 10 pins", Contact Resistance=20mOhm, Manufacturer="Wurth Elektronik", Operating Temperature=-40to105degC, Rated Current=3A, Withstanding Voltage=500VAC, Working Voltage=250VAC, Datasheet URL=https://katalog.we-online.de/em/datasheet/6130xx11121.pdf, Gender=Male, Manufacturer URL=http://www.we-online.de, Mounting Technology=THT, Orientation=Vertical, Package Reference=61301011121, Packaging=Bag, Part Number=61301011121, Pin Number=10, Pitch=2.54mm, Publisher=WurthElektronik, Row Number=Single
PIC32: library part CMP-0048-00469-1, "32-bit Microcontroller with Audio and Graphics Interface, USB and Advanced Analog, 50 MHz, 21 I/O, PMP, -40 to 85 degC, 28-pin SPDIP (SP28), Tube", Manufacturer=Microchip, ComponentLink1Description="Manufacturer URL", ComponentLink1URL=http://www.microchip.com, ComponentLink2Description=Datasheet, ComponentLink2URL=http://ww1.microchip.com/downloads/en/DeviceDoc/61168E.pdf, ComponentLink3Description="Package Specification", ComponentLink3URL=http://www.microchip.com/stellent/groups/techpub_sg/documents/packagingspec/en012702.pdf, ComponentLink4Description="Product URL", ComponentLink4URL=http://www.microchip.com/PIC32MX150F128B, DatasheetVersion="Rev. E", Mounting Technology="Through Hole", PackageDescription="28-Lead Plastic Dual In-Line, 34.86 x 6.79 mm Body, 2.54 mm Pitch", PackageReference=SPDIP-SP28, PackageVersion=C04-070B, PartNumber=PIC32MX150F128B-I/SP
"Power Port": library part CMP-1502-03258-1, "Series 102 - 5.00 mm Horizontal Entry Modular with Pressure Clamp WR-TBL, 2 pin / 691102710002", Manufacturer="Wurth Elektronik", Operating Temperature=-40to105degC, Package Reference=691102710002, Datasheet URL=http://katalog.we-online.de/em/datasheet/6911027100xx.pdf, Manufacturer URL=http://www.we-online.de, Mounting Technology=THT, Packaging=Box, Part Number=691102710002, Pin Number=2, Pitch=5.00mm, Publisher=WurthElektronik
R1 R2 R8: library part CMP-2100-03664-1, "Chip Resistor, 10 KOhm, +/- 1%, 01 W, -55 to 155 degC, 0603 (1608 Metric), RoHS, Tape and Reel / RC0603FR-0710KL", Case Code (Imperial)=0603, Case Code (Metric)=1608, Manufacturer=Yageo, Max Operating Temperature=155degC, Min Operating Temperature=-55degC, Package Description="2-Pin Surface Mount Device, Body 1.6 x 0.8 mm", Power Rating=100mW, Resistance=10KOhm, Temperature Coefficient=100ppm/degreesC, Tolerance=1%, Voltage Rating=75V, Voltage Rating (DC)=50V, Case/Package=0603, Composition=ThickFilm, Datasheet URL=http://www.yageo.com/NewPortal/yageodocoutput?fileName=/pdf/R-Chip/PYu-RC_Group_51_RoHS_L_5.pdf, Datasheet Version="Rev. 5, 10/2016", Depth=0.8mm, Height=0.45mm, Lead Free=LeadFree, Lead Pitch=0.3mm, Length=1.6mm, Manufacturer URL=http://www.yageo.com/, Military Standard=Not, Number of Pins=2, Package Reference=0603, Packaging=TapeandReel, REACH SVHC=NoSVHC, RoHSCompliant=true, Termination=SMD/SMT, Weight=7.1E-05oz, Width=0.8mm
R_LED: library part CMP-1011-00473-3, "Thick Film Chip Resistors 0402 470Ω 0.0625W 1% 100ppm/°C / CR0402-FX-4700GLF", Case Code (Imperial)=0402, Case Code (Metric)=1005, Max Operating Temperature=125°C, Max Power Dissipation=63mW, Min Operating Temperature=-55°C, Package Quantity=10000, Power Rating=62.5mW, Resistance=470R, Temperature Coefficient=100ppm/°C, Tolerance=1%, Voltage Rating=50V, Case/Package=0402, Composition="Thick Film", Contact Plating=Tin, Depth=0.5mm, Height=0.016inch, Length=1mm, Military Standard=Not, Mount="Surface Mount", Number of Terminations=2, Packaging="Tape and Reel", Radiation Hardening=No, Termination=SMD/SMT, Thickness=356um, Width=0.02inch
"Step Down": library part CMP-0069-01922-3, "SIMPLE SWITCHER® Power Converter 150 KHz 1A Step-Down Voltage Regulator, 5-pin TO-220, Pb-Free", Manufacturer="Texas Instruments", PackageTopMarking="NSUZXYTTE#*LM2595T*-3.3 P+", PowerWise=N, ComponentLink1Description="Datasheet URL", ComponentLink1URL=http://www.ti.com/general/docs/lit/getliterature.tsp?genericPartNumber=LM2595&fileType=pdf, CompType=Switcher, PackageDescription="TO-220, Molded, Stagger Bend, 5 Lead", PackageReference=NDH0005A, PinCount=5, RoHS=Y
Wifi/Bluetooth: library part CMP-194065-000008-1, "RX TXRX MOD WIFI SURFACE MOUNT", Case/Package=SMD/SMT, Frequency=2.5GHz, Max Operating Temperature=85°C, Min Operating Temperature=-40°C, Operating Supply Voltage=3.6V, Package Quantity=550, Data Rate=150Mbps, Mount="Surface Mount", Packaging="Cut Tape", Sensitivity=-98dBm, Weight=0.088185oz

## Via types
v1: diameter 0.4, hole 0.35, Top Layer to Bottom Layer, 26 vias
v2: diameter 1.27, hole 0.711, Top Layer to Bottom Layer, 23 vias
v3: diameter 0.7, hole 0.35, Top Layer to Bottom Layer, 5 vias

## Nets (pads, with @x,y where several pads share a name; then routed paths per layer and width w, separated by ;. In a path a pad name is that pad's centre, name@x,y a point inside that pad or via, vN(x,y) a via of type N, cw(c..) or ccw(c..) an arc to the next point about the centre after c; other vN are vias at no path point)
GND: "ESP Reset.2" "PIC Reset.1" "Power Port.1" "Step Down.3" "Step Down.5" C1.2 C4.2 C5.2 C6.2 C7.1 Cin.1 Cout.2 D1.2 FTDI_1.6 FTDI_2.6 ICSP.4 P3.1 PIC32.19 PIC32.27 R2.1 R_LED.1 Wifi/Bluetooth.1 Wifi/Bluetooth.15 Wifi/Bluetooth.38 Wifi/Bluetooth.39 | length 397.2
  Top Layer w0.381: 29.21,83.035 29.21,81.91 29.235,81.884 v1(29.235,80.62) ; v1(33.096,74.93) 34.29,76.124 34.29,76.2 C4.2 ; C5.2 v3(53.34,101.6) ; v1(53.899,94.361) 54.28,93.98 C7.1 ; v1(55.22,90.17) R_LED.1 ; v1(55.855,105.41) 56.82,105.41 57.15,105.74 57.15,107.165 ; C6.2 v3(57.15,101.6) ; v3(59.69,101.6) 59.69,100.913 61.752,98.851 68.378,98.851 68.462,98.935 69.145,98.935 69.405,99.195 69.405,100.77 74.045,105.41 Wifi/Bluetooth.39@75.07,105.41 ; v3(63.5,119.38) 67.32,119.38 69.405,117.295 69.405,115.72 72.38,112.745 75.765,112.745 78.74,109.77 Wifi/Bluetooth.39@78.74,107.245 ; v1(66.37,73.812) 71.43,73.812 71.653,74.036 C1.2 ; FTDI_1.6 v3(81.28,91.44) ; FTDI_2.6 91.643,88.9 v1(92.964,90.221) ; v1(89.281,101.676) 88.427,102.53 84.1,102.53 81.22,105.41 78.74,105.41 Wifi/Bluetooth.39@78.74,107.245 ; v1(91.872,123.165) 94.049,123.165 94.075,123.19 R2.1 ; Wifi/Bluetooth.39@75.07,105.41 75.07,109.08 76.905,109.08 Wifi/Bluetooth.39@76.905,107.245 ; Wifi/Bluetooth.39@75.07,105.41 76.905,105.41 Wifi/Bluetooth.39@76.905,107.245 ; Wifi/Bluetooth.39@76.905,107.245 Wifi/Bluetooth.39@78.74,107.245
  Middle Layer w0.381: PIC32.27 64.77,77.47 66.37,75.87 v1(66.37,73.812)
  Bottom Layer w0.381: v1(29.235,80.62) 29.235,80.035 29.21,80.01 v2(29.21,76.2) v2(31.75,76.2) ; v2(31.75,109.22) 31.75,106.99 D1.2 35.56,103.18 Cout.2 34.29,99.06 31.75,101.6 26.67,101.6 26.09,101.02 26.09,72.411 27.28,71.222 28.042,71.222 v2(29.21,72.39) ; v2(33.02,107.95) Cin.1 49.53,107.95 v2(50.8,109.22) ; 33.47,115.61 35.56,113.52 v2(35.56,109.22) ; PIC32.19 41.91,77.47 33.02,77.47 v2(31.75,76.2) ; 49.1,116.65 49.1,110.994 49.53,110.564 v2(49.53,110.49) v2(50.8,109.22) ; v2@51.943,91.44 v2(52.07,91.44) ; 52.5,116.65 52.5,111.33 v2(53.34,110.49) ; v2(53.34,102.87) v3(53.34,101.6) ; v1(53.899,94.361) 53.01,95.25 v2(52.07,95.25) ; v1(55.22,90.17) 53.34,90.17 v2(52.07,91.44) ; v3(59.69,101.6) v2(59.69,102.87) v2(57.15,102.87) ; v2(60.071,119.101) 63.221,119.101 v3(63.5,119.38) 85.09,119.38 v2(90.17,124.46) 91.465,123.165 v1(91.872,123.165) ; v1(66.37,73.812) 64.539,73.812 63.142,72.415 49.352,72.415 49.327,72.39 v2(29.21,72.39) ; v3(81.28,91.44) v2(91.44,91.44) 92.659,90.221 94.031,90.221 v2(95.25,91.44) 93.98,92.71 93.98,93.955 v2@93.968,93.968 ; P3.1 96.345,93.98 v2(97.097,94.732) ; v1(89.281,101.676) 92.71,98.247 92.71,95.275 v2@92.698,95.262 ; v2(92.71,95.25) 93.294,94.666 93.566,94.666 93.968,94.264 v2@93.968,93.992 ; ICSP.4 97.814,85.114 97.814,94.015 97.109,94.72 v2@97.085,94.72 ; v2(29.21,72.39) v2(27.94,73.66) 27.94,73.685 28.727,74.473 29.667,74.473 v2(30.48,73.66) 31.826,73.66 v1(33.096,74.93) 33.091,74.93 31.821,76.2 v2(31.75,76.2) ; v2(50.8,109.22) 54.61,105.41 v1(55.855,105.41) 55.855,104.165 v2(57.15,102.87) ; v2(52.07,91.44) v2(52.07,95.25) ; v2(52.07,95.25) 52.07,100.33 v3(53.34,101.6) ; v3(53.34,101.6) v3(57.15,101.6) v2(57.15,102.87)
  other v2: 93.98,93.98
NetC1_1: "Step Down.4" C1.1 C3.2 C5.1 C6.1 Cout.1 FTDI_1.4 FTDI_2.4 ICSP.5 Inductor.2 PIC32.13 PIC32.28 R1.2 R8.2 Wifi/Bluetooth.2 | length 213.3
  Top Layer w0.381: C3.2 29.21,95.783 v1(29.54,95.453) ; Inductor.2 45.72,108.331 ; v1(45.923,106.248) 45.161,107.01 45.161,107.975 45.517,108.331 45.72,108.331 ; v1(47.727,96.901) 48.108,96.52 R8.2 ; v1(48.108,98.501) 48.387,98.501 48.514,98.374 50.462,98.374 51.046,97.79 52.908,97.79 ; R1.2 50.8,105.315 48.03,108.085 45.966,108.085 45.72,108.331 ; C5.1 53.34,98.222 52.908,97.79 ; C6.1 57.125,99.06 56.439,98.374 56.439,98.273 ; PIC32.28 69.012,80.01 69.748,80.747 ; Wifi/Bluetooth.2 70.675,98.72 69.771,97.815 56.896,97.815 56.439,98.273 ; C1.1 71.653,78.842 69.748,80.747 ; FTDI_1.4 77.287,83.82 72.365,88.742 72.365,89.281 ; FTDI_2.4 82.575,83.82 81.329,85.066 ; ICSP.5 95.226,85.066 87.094,85.066 86.871,85.289 81.552,85.289 81.329,85.066 ; 52.908,97.79 52.908,97.658 53.106,97.46 54.458,97.46 55.27,98.273 56.439,98.273 ; 69.748,80.747 69.748,85.683 68.859,86.572 v1(68.859,91.516) 70.129,91.516 72.365,89.281 ; 72.365,89.281 73.989,89.281 78.204,85.066 81.329,85.066
  Middle Layer w0.381: v1(29.54,95.453) 29.845,95.148 31.572,95.148 34.019,97.595 34.019,98.924 36.466,101.371 42.113,101.371 ; PIC32.13 42.113,92.913 42.113,101.371 ; Cout.1 45.974,101.854 ; v1(47.727,96.901) 46.668,97.96 46.27,97.96 45.72,98.51 ; v1(48.108,98.501) 47.598,99.011 47.598,99.914 46.743,100.769 ; 50.8,120.65 47.856,117.706 47.856,107.518 47.042,106.704 46.379,106.704 v1(45.923,106.248) 45.923,104.623 45.72,104.419 ; v1(68.859,91.516) 67.589,92.786 49.107,92.786 45.161,96.732 45.161,97.951 45.72,98.51 ; 42.113,101.371 43.409,102.667 44.32,102.667 45.309,103.656 45.309,104.008 45.72,104.419 ; 45.72,98.51 45.72,99.746 46.743,100.769 ; 45.72,104.419 45.974,104.165 45.974,101.854 ; 45.974,101.854 46.743,101.085 46.743,100.769
NetC2_1: "PIC Reset.2" C2.1 ICSP.6 PIC32.1 R1.1 | length 110.4
  Top Layer w0.381: 29.21,92.225 29.21,94.424 28.366,95.268 28.366,99.608 28.188,99.786 28.188,104.126 29.079,105.016 32.071,105.016 34.217,102.87 ; C2.1 30.55,104.07 31.973,102.647 33.994,102.647 34.217,102.87 ; v1(50.648,100.305) 50.648,102.812 50.8,102.965 R1.1 45.043,103.39 44.523,102.87 34.217,102.87 ; v1(60.376,94.894) 64.294,90.976 64.294,90.646 PIC32.1 ; v1(87.681,96.495) 92.869,96.495 92.895,96.52 96.737,92.677 96.737,89.117 ICSP.6
  Middle Layer w0.381: v1(50.648,100.305) 55.702,95.25 59.69,95.25 ; v1(60.376,94.894) 60.02,95.25 59.69,95.25 ; v1(87.681,96.495) 60.935,96.495 59.69,95.25
NetC2_2: C2.2 C3.1 PIC32.8 | length 33.5
  Top Layer w0.381: C2.2 29.21,99.844 29.149,99.784 29.011,99.784 29.135,99.66 C3.1 32.014,99.66 35.897,95.776 48,95.776 50.495,93.282 50.495,88.595 PIC32.8
NetC4_1: C4.1 PIC32.20 | length 11.7
  Top Layer w0.381: C4.1 38.16,76.2 39.41,77.45 43.16,77.45 43.18,77.47 44.45,77.47 PIC32.20
NetC7_2: C7.2 R8.1 Wifi/Bluetooth.3 | length 23.3
  Top Layer w0.381: R8.1 55.817,96.52 56.528,97.231 60.297,97.231 60.458,97.07 ; C7.2 59.025,93.98 59.249,94.203 59.249,94.64 58.946,94.942 58.946,95.558 59.832,96.444 60.102,96.444 60.325,96.667 60.325,96.937 60.458,97.07 ; Wifi/Bluetooth.3 71.945,98.72 70.295,97.07 60.458,97.07
NetCin_2: "Power Port.2" "Step Down.2" Cin.2 | length 21.4
  Middle Layer w0.381: 33.47,120.61 37.603,120.61 ; Cin.2 40.64,117.573 37.603,120.61 ; 47.4,120.65 45.978,122.072 39.065,122.072 37.603,120.61
NetCrystal_1: Crystal.1 PIC32.9 | length 9.1
  Top Layer w0.381: Crystal.1 49.485,92.71 49.709,92.487 49.709,90.349 PIC32.9
NetCrystal_2: Crystal.2 PIC32.10 | length 9.4
  Top Layer w0.381: Crystal.2 38.91,92.71 43.776,87.844 44.236,87.844 PIC32.10
NetD1_1: "Step Down.1" D1.1 Inductor.1 | length 18.4
  Top Layer w0.381: Inductor.1 45.72,110.815 45.923,111.019 v1(45.923,113.208)
  Middle Layer w0.381: D1.1 44.14,113.99 45.7,115.55 ; 45.7,116.65 45.7,115.55 ; v1(45.923,113.208) 45.923,115.327 45.7,115.55
NetFTDI_1_2: FTDI_1.2 PIC32.15 | length 49.2
  Top Layer w0.381: PIC32.15 35.434,78.866 42.384,78.866 43.18,79.663 43.18,80.357 43.976,81.154 52.544,81.154 53.466,80.231 53.466,79.536 55.533,77.47 67.17,77.47 67.754,76.886 v1(68.631,76.886)
  Bottom Layer w0.381: v1(68.631,76.886) 70.485,78.74 FTDI_1.2
NetFTDI_1_3: FTDI_1.3 PIC32.16 | length 46.4
  Top Layer w0.381: PIC32.16 38.558,81.738 54.5,81.738 55.754,80.484 55.754,79.536 55.496,79.279 55.496,78.963 55.719,78.74 67.31,78.74 67.589,78.461 v1(68.58,78.461)
  Bottom Layer w0.381: v1(68.58,78.461) 69.19,78.461 72.009,81.28 FTDI_1.3
NetFTDI_2_2: FTDI_2.2 PIC32.24 | length 42.6
  Bottom Layer w0.381: PIC32.24 58.294,78.866 60.164,78.866 61.086,79.789 61.086,80.484 66.505,85.902 71.261,85.902 75.552,90.194 79.276,90.194 82.854,86.616 82.854,83.516 FTDI_2.2
NetFTDI_2_3: FTDI_2.3 PIC32.25 | length 37.1
  Bottom Layer w0.381: PIC32.25 66.166,86.486 71.019,86.486 75.31,90.778 79.518,90.778 83.438,86.858 83.438,85.472 FTDI_2.3
NetICSP_2: ICSP.2 PIC32.22 | length 55.4
  Top Layer w0.381: PIC32.22 52.07,72.593 53.264,71.399 89.179,71.399 ICSP.2
NetICSP_3: ICSP.3 PIC32.21 | length 65.1
  Top Layer w0.381: PIC32.21 49.53,72.568 51.557,70.54 93.217,70.54 97.814,75.137 97.814,79.986 ICSP.3
NetLED_1: LED.1 PIC32.2 | length 3.1
  Top Layer w0.381: LED.1 64.77,88.9 PIC32.2
NetLED_2: LED.2 R_LED.2 | length 3.1
  Top Layer w0.381: R_LED.2 LED.2
NetP1_1: P1.1 Wifi/Bluetooth.13 | length 12.3
  Top Layer w0.381: Wifi/Bluetooth.13 84.645,98.235 85.09,97.79 P1.1
NetP1_2: P1.2 Wifi/Bluetooth.16 | length 9.8
  Top Layer w0.381: Wifi/Bluetooth.16 88.828,103.8 92.298,100.33 P1.2
NetP1_3: P1.3 Wifi/Bluetooth.17 | length 9.2
  Top Layer w0.381: Wifi/Bluetooth.17 88.384,105.07 90.584,102.87 P1.3
NetP1_4: P1.4 Wifi/Bluetooth.18 | length 8.7
  Top Layer w0.381: Wifi/Bluetooth.18 87.94,106.34 88.87,105.41 P1.4
NetP1_5: P1.5 Wifi/Bluetooth.19 | length 8.5
  Top Layer w0.381: Wifi/Bluetooth.19 87.94,107.61 88.28,107.95 P1.5
NetP1_6: P1.6 Wifi/Bluetooth.20 | length 9
  Top Layer w0.381: Wifi/Bluetooth.20 90.517,108.88 92.127,110.49 P1.6
NetP1_7: P1.7 Wifi/Bluetooth.21 | length 9.5
  Top Layer w0.381: Wifi/Bluetooth.21 89.753,110.15 92.633,113.03 P1.7
NetP1_8: P1.8 Wifi/Bluetooth.22 | length 10.1
  Top Layer w0.381: Wifi/Bluetooth.22 89.247,111.42 93.397,115.57 P1.8
NetP1_9: P1.9 Wifi/Bluetooth.24 | length 10.1
  Top Layer w0.381: Wifi/Bluetooth.24 87.465,113.96 91.615,118.11 P1.9
NetP1_10: P1.10 Wifi/Bluetooth.27 | length 15.5
  Top Layer w0.381: Wifi/Bluetooth.27 83.375,117.77 87.898,122.294 90.484,122.294 92.128,120.65 P1.10
NetP2_1: P2.1 Wifi/Bluetooth.28 | length 8.2
  Top Layer w0.381: Wifi/Bluetooth.28 82.105,118.935 P2.1
NetP2_2: P2.2 Wifi/Bluetooth.29 | length 7.7
  Top Layer w0.381: Wifi/Bluetooth.29 80.835,118.715 83.82,121.7 P2.2
NetP2_3: P2.3 Wifi/Bluetooth.30 | length 7.2
  Top Layer w0.381: Wifi/Bluetooth.30 79.565,119.35 81.28,121.065 P2.3
NetP2_4: P2.4 Wifi/Bluetooth.31 | length 6.6
  Top Layer w0.381: Wifi/Bluetooth.31 78.295,117.77 78.74,118.215 P2.4
NetP2_5: P2.5 Wifi/Bluetooth.32 | length 6.8
  Top Layer w0.381: P2.5 77.025,122.365 Wifi/Bluetooth.32
NetP2_6: P2.6 Wifi/Bluetooth.33 | length 7.3
  Top Layer w0.381: P2.6 75.755,121.095 Wifi/Bluetooth.33
NetP2_7: P2.7 Wifi/Bluetooth.34 | length 7.8
  Top Layer w0.381: P2.7 74.485,119.825 Wifi/Bluetooth.34
NetP2_8: P2.8 Wifi/Bluetooth.35 | length 8.4
  Top Layer w0.381: P2.8 73.215,118.555 Wifi/Bluetooth.35
NetP2_9: P2.9 Wifi/Bluetooth.36 | length 9.2
  Top Layer w0.381: P2.9 66.273,122.957 66.759,122.957 71.945,117.77 Wifi/Bluetooth.36
NetP2_10: P2.10 Wifi/Bluetooth.37 | length 10.4
  Top Layer w0.381: P2.10 66.04,120.65 67.795,120.65 70.675,117.77 Wifi/Bluetooth.37
NetP3_2: P3.2 Wifi/Bluetooth.12 | length 5.9
  Top Layer w0.381: Wifi/Bluetooth.12 83.375,98.72 83.82,98.275 P3.2
NetP3_3: P3.3 Wifi/Bluetooth.11 | length 6.1
  Top Layer w0.381: P3.3 81.28,96.34 82.105,97.165 Wifi/Bluetooth.11
NetP3_4: P3.4 Wifi/Bluetooth.10 | length 6.6
  Top Layer w0.381: P3.4 78.74,95.694 80.835,97.789 Wifi/Bluetooth.10
NetP3_5: P3.5 Wifi/Bluetooth.9 | length 7.2
  Top Layer w0.381: P3.5 79.565,97.345 Wifi/Bluetooth.9
NetP3_6: P3.6 Wifi/Bluetooth.8 | length 7.7
  Top Layer w0.381: P3.6 78.295,98.615 Wifi/Bluetooth.8
NetP3_7: P3.7 Wifi/Bluetooth.7 | length 8.9
  Top Layer w0.381: P3.7 71.785,94.645 72.637,94.645 74.458,96.466 74.772,96.466 77.025,98.72 Wifi/Bluetooth.7
NetP3_8: P3.8 Wifi/Bluetooth.6 | length 10.2
  Top Layer w0.381: P3.8 68.601,93.98 69.85,95.229 72.265,95.229 75.755,98.72 Wifi/Bluetooth.6
NetP3_9: P3.9 Wifi/Bluetooth.5 | length 11.4
  Top Layer w0.381: P3.9 67.873,95.813 71.579,95.813 74.485,98.72 Wifi/Bluetooth.5
NetP3_10: P3.10 Wifi/Bluetooth.4 | length 12.7
  Top Layer w0.381: P3.10 65.918,96.398 70.893,96.398 73.215,98.72 Wifi/Bluetooth.4
NetPIC32_3: PIC32.3 Pins.1 | length 13.2
  Middle Layer w0.381: PIC32.3 63.5,86.36 Pins.1
NetPIC32_4: PIC32.4 Pins.3 | length 13.2
  Middle Layer w0.381: Pins.3 58.42,86.36 PIC32.4
NetPIC32_5: PIC32.5 Pins.4 | length 13.2
  Middle Layer w0.381: Pins.4 55.88,86.36 PIC32.5
NetPIC32_6: PIC32.6 Wifi/Bluetooth.14 | length 46.4
  Top Layer w0.381: Wifi/Bluetooth.14 88.672,99.745 v1(89.459,98.958)
  Middle Layer w0.381: PIC32.6 57.676,90.696 74.251,90.696 74.333,90.778 80.024,90.778 80.106,90.696 81.621,90.696 82.633,91.708 86.245,91.708 90.17,95.633 90.17,98.247 v1(89.459,98.958)
NetPIC32_7: PIC32.7 Wifi/Bluetooth.26 | length 75.7
  Top Layer w0.381: v1(65.608,91.465) 67.285,91.465 67.31,91.44 68.054,92.184 88.913,92.184 88.92,92.177 v1(88.925,92.177) ; Wifi/Bluetooth.26 84.645,117.77 87.699,120.824 87.855,120.824 v1(87.859,120.828)
  Middle Layer w0.381: PIC32.7 52.07,89.085 54.451,91.465 v1(65.608,91.465) ; v1(87.859,120.828) 90.754,117.932 90.754,94.005 v1(88.925,92.177)
NetPIC32_11: PIC32.11 Pins.6 | length 16.6
  Middle Layer w0.381: PIC32.11 45.846,83.694 45.846,79.536 50.219,75.163 50.567,75.163 Pins.6
NetPIC32_12: PIC32.12 Pins.7 | length 16.6
  Middle Layer w0.381: PIC32.12 43.306,83.694 43.306,79.536 47.679,75.163 48.027,75.163 Pins.7
NetPIC32_14: PIC32.14 Pins.9 | length 16.4
  Middle Layer w0.381: PIC32.14 40.514,81.406 40.514,77.596 Pins.9
NetPIC32_17: PIC32.17 Pins.10 | length 5.6
  Middle Layer w0.381: PIC32.17 39.37,76.2 Pins.10
NetPIC32_18: PIC32.18 Pins.8 | length 6.7
  Middle Layer w0.381: PIC32.18 41.91,78.74 Pins.8
NetPIC32_23: PIC32.23 Pins.5 | length 5.6
  Middle Layer w0.381: Pins.5 53.34,78.74 PIC32.23
NetPIC32_26: PIC32.26 Pins.2 | length 5.6
  Middle Layer w0.381: Pins.2 60.96,78.74 PIC32.26
NetR2_2: R2.2 Wifi/Bluetooth.23 | length 17.3
  Top Layer w0.381: Wifi/Bluetooth.23 89.691,112.69 93.765,116.764 95.592,116.764 96.444,117.616 96.444,121.144 96,121.588 R2.2
NetSwitch2_1: "ESP Reset.1" Wifi/Bluetooth.25 | length 46.9
  Top Layer w0.381: 57.15,116.355 57.15,121.92 v1(57.988,122.758) ; Wifi/Bluetooth.25 85.915,117.77 89.578,121.434 89.633,121.434 v1(89.637,121.437)
  Middle Layer w0.381: v1(57.988,122.758) 59.614,124.384 87.323,124.384 89.637,122.07 v1(89.637,121.437)
pads on no net: FTDI_1.1 FTDI_1.5 FTDI_2.1 FTDI_2.5 ICSP.1

## Polygon pours and split planes (outlines as drawn)
GND on Bottom Layer "GND_L04_P024" (solid, pour order 24): 89.535,93.345 92.71,90.17 96.52,90.17 99.907,93.557 98.425,96.52 92.71,96.52
GND on Bottom Layer "GND_L04_P023" (solid, pour order 23): 52.07,104.14 60.96,104.14 60.96,100.33 52.07,100.33
GND on Bottom Layer "GND_L04_P014" (solid, pour order 14): 88.9,125.73 88.9,123.19 90.17,123.19 91.44,121.92 91.44,125.73
GND on Bottom Layer "GND_L04_P007" (solid, pour order 7): 50.8,96.215 50.8,89.84 53.746,89.84 53.746,96.215
GND on Bottom Layer "GND_L04_P019" (solid, pour order 19): 25.552,72.568 28.161,70.347 33.811,75.234 34.168,76.2 41.91,76.2 45.72,78.74 45.72,81.28 43.18,81.28 40.64,78.74 29.21,78.74 27.94,77.47 27.94,76.2
GND on Bottom Layer "GND_L04_P026" (solid, pour order 26): 58.953,120.675 58.953,118.034 64.465,118.034 64.491,118.567 64.491,119.024 64.491,120.752 59.055,120.752 59.03,120.726
GND on Bottom Layer "GND_L04_P020" (solid, pour order 20): 48.26,118.11 54.61,118.11 54.61,110.49 52.07,107.95 49.53,107.95 48.26,109.22
GND on Bottom Layer "GND_L04_P021" (solid, pour order 21): 31.75,116.84 35.56,116.84 36.83,115.57 36.83,110.49 38.1,109.22 41.91,109.22 41.91,106.68 38.1,106.68 36.83,105.41 36.83,102.87 34.29,102.87 31.75,105.41 30.48,105.41 30.48,110.49 31.75,111.76
GND on Bottom Layer "GND_L04_P001" (solid, pour order 1): 73.66,110.49 73.66,104.14 80.01,104.14 80.01,110.49
no net on Blank Copper Layer (split plane): 102.944,70.437 22.075,70.437 22.075,126.49 102.944,126.49

## Silkscreen, mask and mechanical layers (free items; w line width, h text height)
Top Overlay:
  text "IO23" at 62.609,124.966 h0.35
  text "IO22" at 65.287,124.966 h0.35
  text "TXD0" at 67.964,124.966 h0.35
  text "RXD0" at 70.699,124.966 h0.35
  text "IO21" at 73.435,124.966 h0.35
  text "NC" at 75.995,124.966 h0.35
  text "IO19" at 78.031,124.966 h0.35
  text "IO18" at 80.65,124.966 h0.35
  text "IO5" at 83.269,124.966 h0.35
  text "IO17" at 85.596,124.966 h0.35
  text "IO16" at 97.255,121.033 h0.35 r270
  text "VCC" at 28.222,120.044 h0.55 r90
  text "IO2" at 97.255,118.478 h0.35 r270
  text "SD1" at 97.255,115.924 h0.35 r270
  text "GND" at 28.222,114.888 h0.55 r90
  text "SD0" at 97.255,113.37 h0.35 r270
  text "CLK" at 97.255,110.816 h0.35 r270
  text "CMD" at 97.255,108.262 h0.35 r270
  text "SD3" at 97.255,105.708 h0.35 r270
  text "SD2" at 97.255,103.154 h0.35 r270
  text "IO13" at 97.255,100.6 h0.35 r270
  text "IO14" at 97.255,98.046 h0.35 r270
  text "VP" at 63.335,91.845 h0.35
  text "VN" at 65.382,91.769 h0.35
  text "IO35" at 70.117,91.769 h0.35
  text "IO32" at 72.805,91.769 h0.35
  text "IO33" at 75.494,91.769 h0.35
  text "IO25" at 78.182,91.769 h0.35
  text "IO26" at 80.87,91.769 h0.35
  text "IO27" at 83.558,91.769 h0.35
  text "GND" at 86.246,91.769 h0.35
  text "IO34" at 67.429,91.743 h0.35
  text "GND" at 91.162,88.355 h0.35 r90
  text "GND" at 82.221,88.278 h0.35 r90
  text "MCLR" at 99.874,88.154 h0.35 r90
  text "N/A" at 91.162,85.801 h0.35 r90
  text "N/A" at 82.221,85.724 h0.35 r90
  text "VDD3.3" at 99.874,85.279 h0.35 r90
  text "GND" at 99.874,83.104 h0.35 r90
  text "VDD3.3" at 91.162,82.634 h0.35 r90
  text "VDD3.3" at 82.221,82.558 h0.35 r90
  text "TX" at 91.162,80.751 h0.35 r90
  text "TX" at 99.874,80.725 h0.35 r90
  text "TX" at 82.221,80.674 h0.35 r90
  text "RX" at 91.162,78.196 h0.35 r90
  text "RX" at 99.874,78.171 h0.35 r90
  text "RX" at 82.221,78.12 h0.35 r90
  text "N/A" at 91.162,75.467 h0.35 r90
  text "N/A" at 99.874,75.442 h0.35 r90
  text "N/A" at 82.221,75.391 h0.35 r90
  text "RB8" at 40.196,72.668 h0.35
  text "RB5" at 42.605,72.668 h0.35
  text "RB9" at 45.13,72.668 h0.35
  text "RA4" at 47.742,72.668 h0.35
  text "RB4" at 50.296,72.668 h0.35
  text "RB12" at 52.704,72.668 h0.35
  text "RB1" at 55.463,72.668 h0.35
  text "RB0" at 57.958,72.668 h0.35
  text "RB15" at 60.483,72.668 h0.35
  text "RA1" at 63.242,72.668 h0.35
Mechanical 1:
  circle w0.254: c23.698,124.181 r1
  circle w0.254: c23.825,72.568 r1
  circle w0.254: c100.863,72.568 r1
  circle w0.254: c100.762,123.876 r1
Border Outline:
  lines w0.254: 21.565,69.926 21.565,126.975 21.59,127 103.454,127 103.454,70.129 103.251,69.926 21.844,69.926 21.565,69.926

## Text inside footprints (layer, text, board x,y; h text height)
P1: Top Overlay "10" at 98.171,121.183 h1.02 r270; Top Overlay "1" at 98.755,97.841 h1.02 r270
P2: Top Overlay "10" at 60.046,124.993 h1.02; Top Overlay "1" at 88.24,125.273 h1.02
P3: Top Overlay "10" at 61.57,95.072 h1.02 r90; Top Overlay "1" at 88.9,95.25 h1.02 r180
Pins: Top Overlay "10" at 38.633,74.041 h1.02 r90; Top Overlay "1" at 66.446,74.651 h1.02 r90